# Altium PCB InputModule.PcbDoc
Units mm, origin at the board's own origin, x right, y up, seen from the top; angles counter-clockwise.
Board outline 37.08 x 57.91 mm, 2 copper layers (Top Layer, Bottom Layer); 53 components, 37 nets, 188 pads, 87 vias.
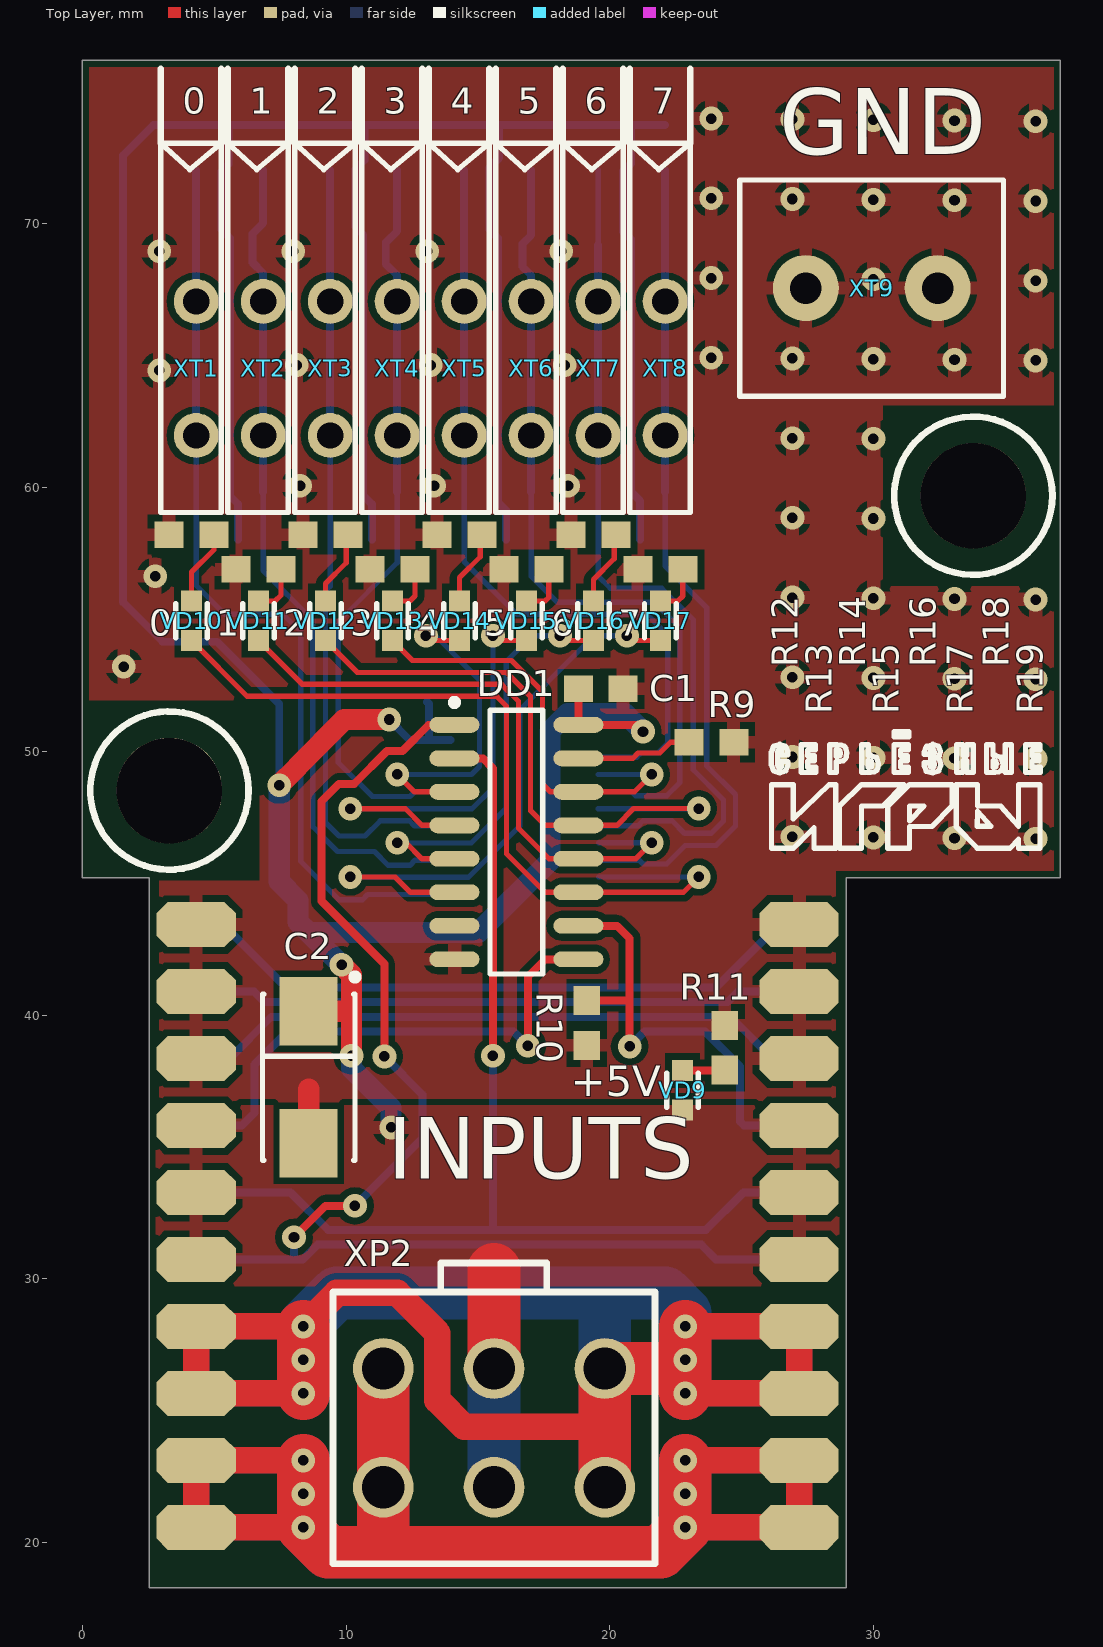
[diagram p0: Top Layer view]
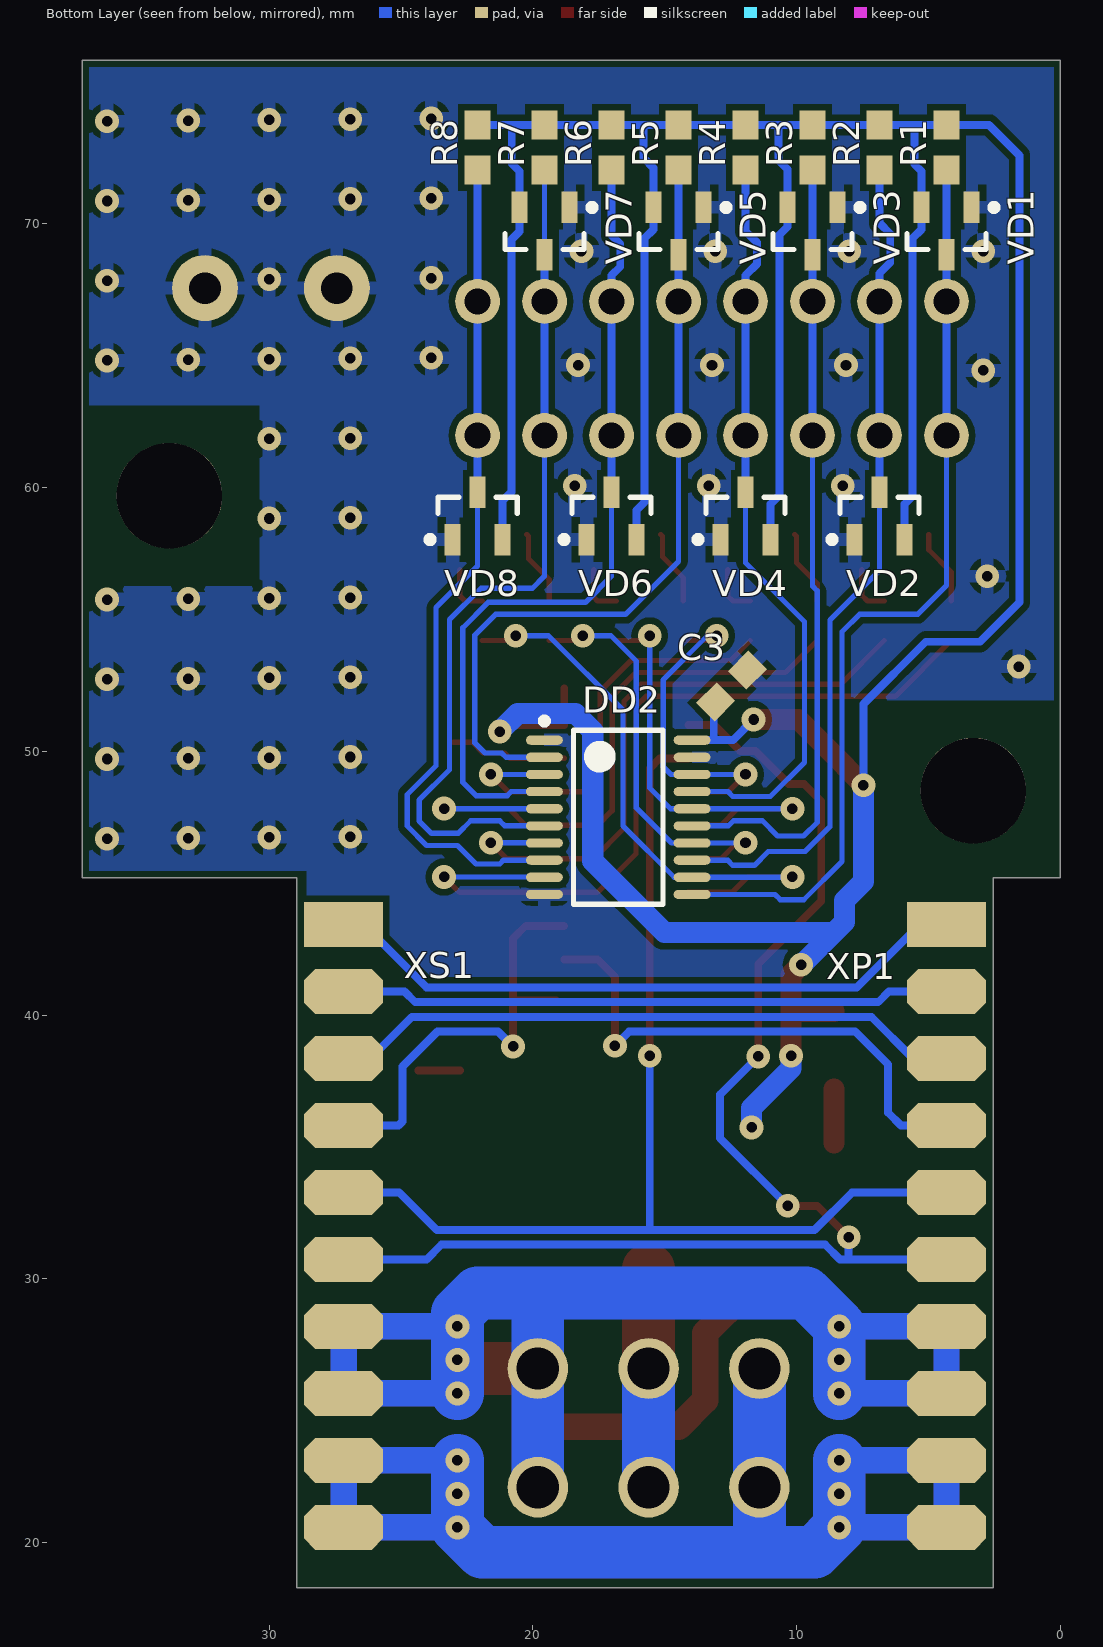
[diagram p1: Bottom Layer view, seen from below]
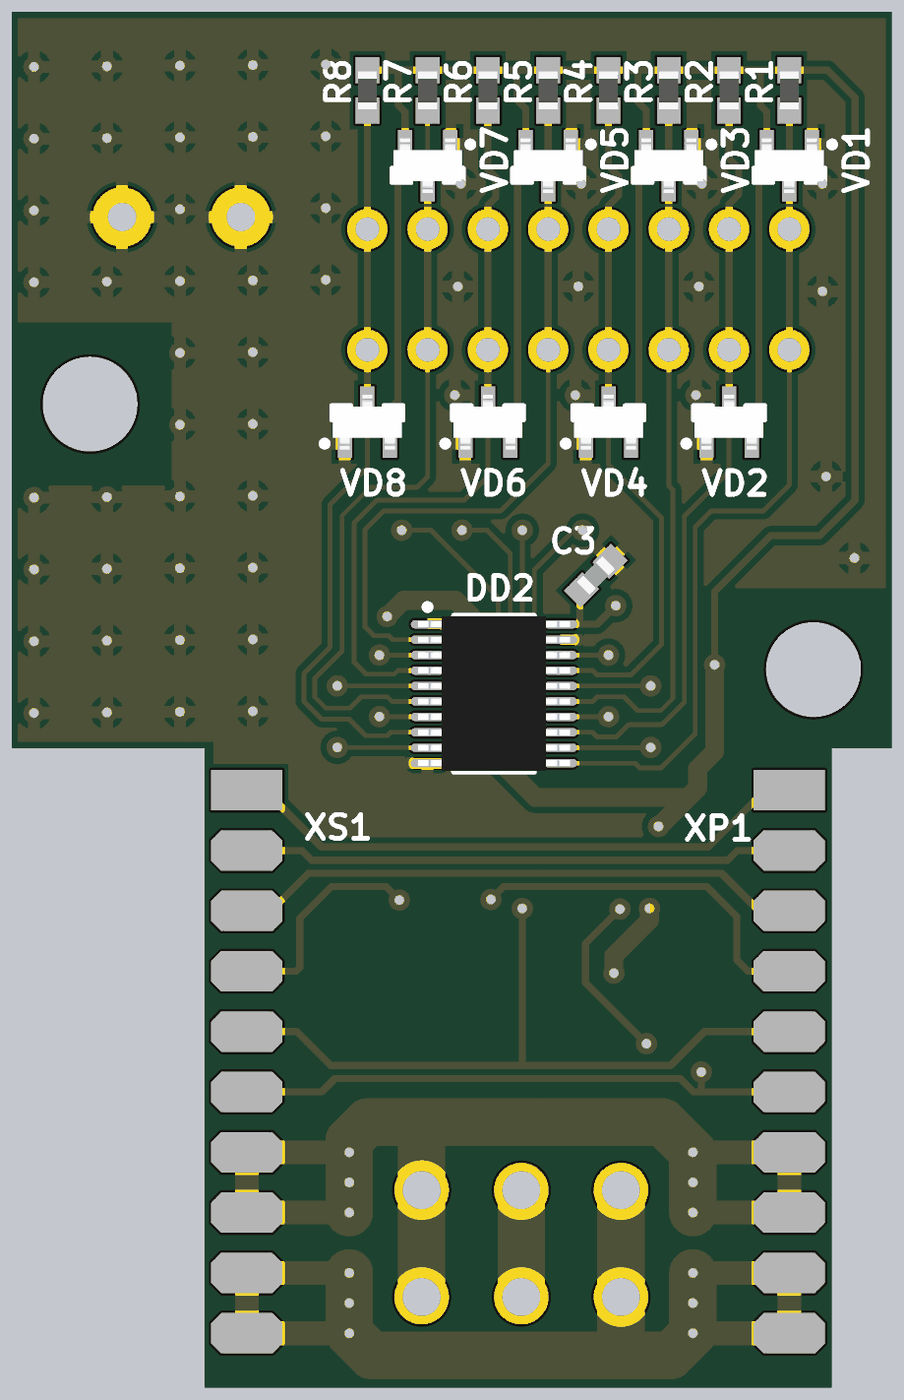
[diagram p2: 3D render of the assembled board from below, using the file's embedded part models]

## Layer stack, top to bottom
Top Layer: signal copper 0.0356
Dielectric: dielectric 0.32, FR-4, Dk 4.8
Bottom Layer: signal copper 0.0356

## Board outline
0,45.212 0,76.2 37.084,76.2 37.084,45.212 28.956,45.212 28.956,18.288 2.54,18.288 2.54,45.212

## Design rules (kind name [scope] priority, off if disabled: settings)
Clearance [All] p1: gap=0.254
PolygonConnect [All] p1: connectstyle=Relief reliefconductorwidth=0.5 reliefentries=4 polygonreliefangle="90 Angle"
RoutingVias [All] p1: holewidth=0.4 width=0.9 viastyle="Through Hole" minholewidth=0.3 minwidth=0.6 maxholewidth=7 maxwidth=7
SilkscreenOverComponentPads [All] p1: minsilkscreentomaskgap=0.254
SolderMaskExpansion [All] p1: expansion=0.102
Width [All] p1: maxlimit=5 minlimit=0.2 preferedwidth=0.3
27 further rules are at their usual default settings.

## Components (designator, comment, footprint, x,y, rotation, side; value= is the part's Value field where it differs from the comment)
C1 "0.1uF" C-1608[0603] 19.66,52.375 r0 top
C2 "47uF" C-CASE 8.585,37.643 r270 top
C3 "0.1uF" C-1608[0603] 12.471,52.476 r135 bottom
DD1 "74HC165D" SO-G16 16.459,46.558 r0 top
DD2 "SN74AHCT244" TSSOP20 16.764,47.498 r180 bottom
R1 "10K" R-1608[0603] 4.318,72.898 r90 bottom
R2 "10K" R-1608[0603] 6.858,72.898 r90 bottom
R3 "10K" R-1608[0603] 9.398,72.898 r90 bottom
R4 "10K" R-1608[0603] 11.938,72.898 r90 bottom
R5 "10K" R-1608[0603] 14.478,72.898 r90 bottom
R6 "10K" R-1608[0603] 17.018,72.898 r90 bottom
R7 "10K" R-1608[0603] 19.558,72.898 r90 bottom
R8 "10K" R-1608[0603] 22.098,72.898 r90 bottom
R9 "10K" R-1608[0603] 23.851,50.343 r0 top
R10 "10K" R-1608[0603] 19.126,39.7 r270 top
R11 "1K" R-1608[0603] 24.359,38.76 r270 top
R12 "1K" R-1608[0603] 4.14,58.217 r0 top locked
R13 "1K" R-1608[0603] 6.68,56.896 r0 top locked
R14 "1K" R-1608[0603] 9.22,58.217 r0 top locked
R15 "1K" R-1608[0603] 11.76,56.896 r0 top locked
R16 "1K" R-1608[0603] 14.3,58.217 r0 top locked
R17 "1K" R-1608[0603] 16.84,56.896 r0 top locked
R18 "1K" R-1608[0603] 19.38,58.217 r0 top locked
R19 "1K" R-1608[0603] 21.92,56.896 r0 top locked
VD1 "BAT54S" SOT-23 4.318,69.723 r270 bottom
VD2 "BAT54S" SOT-23 6.858,58.928 r90 bottom
VD3 "BAT54S" SOT-23 9.398,69.723 r270 bottom
VD4 "BAT54S" SOT-23 11.938,58.928 r90 bottom
VD5 "BAT54S" SOT-23 14.478,69.723 r270 bottom
VD6 "BAT54S" SOT-23 17.018,58.928 r90 bottom
VD7 "BAT54S" SOT-23 19.558,69.723 r270 bottom
VD8 "BAT54S" SOT-23 22.098,58.928 r90 bottom
VD9 "L-C191KGCT" LED-0603 22.758,37.897 r270 top
VD10 "L-C191KGCT" LED-0603 4.14,55.7 r270 top locked
VD11 "L-C191KGCT" LED-0603 6.68,55.7 r270 top locked
VD12 "L-C191KGCT" LED-0603 9.22,55.7 r270 top locked
VD13 "L-C191KGCT" LED-0603 11.76,55.7 r270 top locked
VD14 "L-C191KGCT" LED-0603 14.3,55.7 r270 top locked
VD15 "L-C191KGCT" LED-0603 16.84,55.7 r270 top locked
VD16 "L-C191KGCT" LED-0603 19.38,55.7 r270 top locked
VD17 "L-C191KGCT" LED-0603 21.92,55.7 r270 top locked
XP1 "PLD-20" "PLD-20 ROT" 4.318,43.434 r180 bottom
XP2 "MF-6M" MF-6M 19.812,22.098 r180 top
XS1 "PBD-20" "PBD-20 Rot" 27.178,43.434 r180 bottom
XT1 "DG141V-01P" "DG141V-01P (XY123R)" 4.318,61.976 r180 top
XT2 "DG141V-01P" "DG141V-01P (XY123R)" 6.858,61.976 r180 top
XT3 "DG141V-01P" "DG141V-01P (XY123R)" 9.398,61.976 r180 top
XT4 "DG141V-01P" "DG141V-01P (XY123R)" 11.938,61.976 r180 top
XT5 "DG141V-01P" "DG141V-01P (XY123R)" 14.478,61.976 r180 top
XT6 "DG141V-01P" "DG141V-01P (XY123R)" 17.018,61.976 r180 top
XT7 "DG141V-01P" "DG141V-01P (XY123R)" 19.558,61.976 r180 top
XT8 "DG141V-01P" "DG141V-01P (XY123R)" 22.098,61.976 r180 top
XT9 "1-1776244-0 (TYCO)" 1-1776244-0 27.432,67.564 r0 top

## Footprints (in the part's own frame and the unit in brackets; to place one, negate y for a bottom-side part, rotate by r counter-clockwise, add the part's x,y. Pads: shape width x height; smd on the part's side, far side on the other; paste and mask are expansions set on the pad)
1-1776244-0 [mm] "Винтовой клеммник 5.0мм"
  round 2.5 hole 1.2: 1(0,0) 2(5,0)
  silkscreen extent -2.5,-4.1 7.5,4.1, body extent -2.5,-4.1 7.5,4.1, height 10
C-1608[0603] [mm]
  rect 1.1x1 smd: 1(-0.85,0) 2(0.85,0)
  body extent -0.76,-0.38 0.76,0.38, height 0.5
C-CASE [mm]
  rect 2.6x2.2 smd: 1(-2.5,0) 2(2.5,0)
  silkscreen extent -3.92,-1.75 3.15,1.88, body extent -3,-1.6 3,1.6, height 2.51
"DG141V-01P (XY123R)" [mm] "Клеммник нажимной 2.54мм (XY123R-1)"
  round 1.7 hole 1: 1(0,0) 1(0,-5.08)
  silkscreen extent -0.95,-11.08 1.34,2.92, body extent -0.95,-11.08 1.34,2.92, height 12
LED-0603 [mm]
  rect 0.8x0.8 smd: 1(0,0) 2(1.5,0)
  silkscreen extent 0.1,-0.6 1.4,0.6
MF-6M [mm] "Molex Male Connector 6 pin"
  round 2.3 hole 1.6: 1(0,0) 2(4.2,0) 3(8.4,0) 4(0,-4.5) 5(4.2,-4.5) 6(8.4,-4.5)
  silkscreen extent -1.91,-8.5 10.31,2.9, body extent -1.91,-7.4 10.3,2.9, height 12.9
"PBD-20 Rot" [mm] "2.54mm 2row 20pin FEMALE connector"
  rect 3x1.7 smd: 1(0,0)
  oct 3x1.7 smd far side: 2(0,0) 4(0,-2.54) 6(0,-5.08) 8(0,-7.62) 10(0,-10.16) 12(0,-12.7) 14(0,-15.24) 16(0,-17.78) 18(0,-20.32) 20(0,-22.86)
  oct 3x1.7 smd: 3(0,-2.54) 5(0,-5.08) 7(0,-7.62) 9(0,-10.16) 11(0,-12.7) 13(0,-15.24) 15(0,-17.78) 17(0,-20.32) 19(0,-22.86)
  body extent -9.78,-24.18 -1.68,1.32, height 2.7
"PLD-20 ROT" [mm] "2.54mm 2 row 20 pin MALE connector"
  rect 3x1.7 smd: 1(0,0)
  oct 3x1.7 smd far side: 2(0,0) 4(0,-2.54) 6(0,-5.08) 8(0,-7.62) 10(0,-10.16) 12(0,-12.7) 14(0,-15.24) 16(0,-17.78) 18(0,-20.32) 20(0,-22.86)
  oct 3x1.7 smd: 3(0,-2.54) 5(0,-5.08) 7(0,-7.62) 9(0,-10.16) 11(0,-12.7) 13(0,-15.24) 15(0,-17.78) 17(0,-20.32) 19(0,-22.86)
  body extent 1.73,-24.08 9.45,1.32, height 2.7
R-1608[0603] [mm]
  rect 1.1x1 smd: 1(-0.85,0) 2(0.85,0)
  body extent -0.8,-0.4 0.8,0.4, height 0.37
SO-G16 [mm] "SOIC, 16-Leads, Body 9.9x3.9mm, Pitch 1.27mm, IPC High Density"
  oval 1.9x0.6 smd: 1(-2.35,4.445) 2(-2.35,3.175) 3(-2.35,1.905) 4(-2.35,0.635) 5(-2.35,-0.635) 6(-2.35,-1.905) 7(-2.35,-3.175) 8(-2.35,-4.445) 9(2.35,-4.445) 10(2.35,-3.175) 11(2.35,-1.905) 12(2.35,-0.635) 13(2.35,0.635) 14(2.35,1.905) 15(2.35,3.175) 16(2.35,4.445)
  silkscreen extent -2.47,-5 1,5.42, body extent -3,-4.95 3,4.95, height 1.53
SOT-23 [mm] "SOT23, 3-Leads, Body 2.9x1.3mm, Pitch 0.95mm, Lead Span 2.5mm, IPC High Density"
  rect 1.2x0.6 smd: 1(-0.9,0.95) 2(-0.9,-0.95) 3(0.9,0)
  silkscreen extent -1.02,-1.5 0.7,1.92, body extent -1.15,-1.45 1.15,1.45, height 1
TSSOP20 [mm] "TSOP, 20-Leads, Body 6.5x4.4mm, Pitch 0.65mm, IPC High Density"
  oval 1.4x0.35 smd: 1(-2.8,2.925) 2(-2.8,2.275) 3(-2.8,1.625) 4(-2.8,0.975) 5(-2.8,0.325) 6(-2.8,-0.325) 7(-2.8,-0.975) 8(-2.8,-1.625) 9(-2.8,-2.275) 10(-2.8,-2.925) 11(2.8,-2.925) 12(2.8,-2.275) 13(2.8,-1.625) 14(2.8,-0.975) 15(2.8,-0.325) 16(2.8,0.325) 17(2.8,0.975) 18(2.8,1.625) 19(2.8,2.275) 20(2.8,2.925)
  silkscreen extent -2.93,-3.3 1.7,3.77, body extent -3.2,-3.25 3.2,3.25, height 0.97

## Part data
C1 C3: library part C-0603, "C-0603"
C2: library part C-CCASE, "C-CCASE"
DD1: "8-Bit Parallel-Load Shift Register"
DD2: library part SN74LVC244APW, "Octal Buffer/Driver with 3-State Outputs"
R1 R2 R3 R4 R5 R6 R7 R8 R9 R10 R11 R12 R13 R14 R15 R16 R17 R18 R19: library part R-0603, "R-0603"
VD1 VD2 VD3 VD4 VD5 VD6 VD7 VD8: "Schottky barrier (double) diodes"
VD9 VD10 VD11 VD12 VD13 VD14 VD15 VD16 VD17: "0603 Green Led"
XP1: "20 pin, 2 row, MALE connector"
XP2: "Molex Male connector"
XS1: "2.54mm, 20 pin FEMALE connector"
XT1 XT2 XT3 XT4 XT5 XT6 XT7 XT8: "Клеммник нажимной 2.54мм"
XT9: "Винтовой клеммник 5.0мм"

## Free pads (board coordinates)
  round 4 hole 4 unplated: 0(3.302,48.514) 0(33.782,59.69)

## Via types
v1: diameter 0.9, hole 0.4, Top Layer to Bottom Layer, tented both sides, 87 vias

## Nets (pads, with @x,y where several pads share a name; then routed paths per layer and width w, separated by ;. In a path a pad name is that pad's centre, name@x,y a point inside that pad or via, vN(x,y) a via of type N, cw(c..) or ccw(c..) an arc to the next point about the centre after c; other vN are vias at no path point)
+5V: C1.1 C2.1 C3.1 DD1.16 DD2.20 R1.2 R2.2 R3.2 R4.2 R5.2 R6.2 R7.2 R8.2 VD1.2 VD2.2 VD3.2 VD4.2 VD5.2 VD6.2 VD7.2 VD8.2 VD9.2 XP1.8 XP1.10 XP1.12 XP2.2 XP2.5 XS1.8 XS1.10 XS1.12 | length 170.1
  Top Layer w0.3: C1.1 DD1.16 21.006,51.003 v1(21.26,50.749)
  Top Layer w0.8: v1(7.468,48.717) 8.153,49.403 8.153,49.428 9.931,51.206 v1(11.633,51.206) ; C2.1 10.196,40.143 ; v1(9.83,41.91) 10.211,41.529 v1(10.211,38.456)
  Top Layer w2: XP2.5 15.612,30.362
  Bottom Layer w0.3: 5.537,73.723 5.537,72.263 5.268,71.994 5.268,71.004 5.268,69.789 5.604,69.453 5.604,59.674 5.908,59.37 VD2.2 ; v1(7.468,48.717) 7.468,51.791 5.105,54.153 3.048,54.153 1.549,55.651 1.549,72.593 2.704,73.748 R1.2 R2.2 R3.2 R4.2 R5.2 R6.2 R7.2 R8.2 ; 10.693,73.723 10.693,72.415 10.348,72.07 10.348,71.004 10.348,69.891 10.652,69.587 10.652,59.706 10.988,59.37 VD4.2 ; v1(11.633,51.206) 12.417,50.423 DD2.20 ; C3.1 13.144,51.804 13.144,50.437 ; 15.799,73.672 15.799,72.492 15.428,72.121 15.428,71.004 15.428,69.789 15.764,69.453 15.764,59.445 16.068,59.141 VD6.2 ; 20.803,73.723 20.803,72.288 20.508,71.994 20.508,71.004 20.508,69.713 20.812,69.409 20.812,59.833 21.148,59.497 VD8.2
  Bottom Layer w0.8: v1(7.468,48.717) 7.468,45.06 8.179,44.348 8.179,43.536 8.585,43.129 ; v1(9.83,41.91) 9.804,41.91 8.585,43.129 ; v1(10.211,38.456) 10.211,37.973 11.709,36.474 v1(11.709,35.738) ; v1(21.26,50.749) 20.574,51.435 18.39,51.435 17.729,50.775 17.729,45.847 15.011,43.129 8.585,43.129
  Bottom Layer w2: XP2.2 XP2.5
+12V_HC: XP1.13 XP1.14 XP1.15 XP1.16 XP2.1 XP2.4 XS1.13 XS1.14 XS1.15 XS1.16 | length 99.8
  Top Layer w1: v1(8.382,25.654) XP1.16 XP1.14 v1(8.382,28.194) 9.652,29.464 11.938,29.464 13.462,27.94 13.462,25.4 14.478,24.384 19.812,24.384 ; v1(22.86,25.654) XS1.16 XS1.14 v1(22.86,28.194)
  Top Layer w2: v1(8.382,25.654) v1(8.382,26.924) v1(8.382,28.194) ; XP2.1 19.812,24.384 XP2.4 22.534,26.598 v1(22.86,26.924) ; v1(22.86,25.654) v1(22.86,26.924) ; v1(22.86,28.194) v1(22.86,26.924)
  Bottom Layer w1: v1(8.382,25.654) XP1.15 XP1.13 v1(8.382,28.194) ; v1(22.86,25.654) XS1.15 XS1.13 v1(22.86,28.194)
  Bottom Layer w2: v1(8.382,25.654) v1(8.382,26.924) v1(8.382,28.194) 9.652,29.464 19.812,29.464 ; XP2.1 XP2.4 19.812,29.464 ; v1(22.86,25.654) v1(22.86,26.924) v1(22.86,28.194) ; 22.86,28.702 22.098,29.464 19.812,29.464
C\E\: DD1.15 R9.1 | length 4.4
  Top Layer w0.2: DD1.15 20.87,49.733 21.073,49.936 21.895,49.936 22.301,50.343 R9.1
CLK: DD1.2 XP1.9 XS1.9 | length 43.2
  Top Layer w0.3: DD1.2 15.189,49.733 15.57,49.352 v1(15.57,38.456)
  Bottom Layer w0.3: XP1.9 7.895,33.274 9.322,31.847 15.57,31.847 ; v1(15.57,38.456) 15.57,31.847 ; XS1.9 25.07,33.274 23.643,31.847 15.57,31.847
DATA_TO_MASTER: DD1.9 XP1.7 | length 20.2
  Top Layer w0.3: v1(16.891,38.837) 16.891,41.453 17.551,42.113 DD1.9
  Bottom Layer w0.3: XP1.7 6.045,35.814 6.528,36.297 6.528,38.125 7.782,39.38 16.348,39.38 v1(16.891,38.837)
DI_0: DD2.11 R1.1 VD1.3 XT1.1 | length 35.9
  Bottom Layer w0.2: XT1.1@4.318,61.976 4.318,56.286 5.41,55.194 7.62,55.194 8.28,54.534 8.28,45.822 9.728,44.374 10.617,44.374 10.816,44.573 DD2.11
  Bottom Layer w0.3: XT1.1@4.318,61.976 4.318,67.056 VD1.3 ; VD1.3@4.318,69.204 VD1.3 ; R1.1 VD1.3
DI_1: DD2.13 R2.1 VD2.3 XT2.1 | length 31.9
  Bottom Layer w0.2: VD2.3 6.858,56.86 8.738,54.98 8.738,47.142 9.677,46.203 11.074,46.203 11.6,45.677 12.421,45.677 12.617,45.873 DD2.13
  Bottom Layer w0.3: VD2.3 6.858,61.976 6.858,67.056 6.858,68.123 6.452,68.529 6.452,69.621 6.858,70.028 R2.1
DI_2: DD2.15 R3.1 VD3.3 XT3.1 | length 30.5
  Bottom Layer w0.2: XT3.1@9.398,61.976 9.398,56.261 9.22,56.083 9.22,47.302 9.735,46.787 10.719,46.787 11.301,47.369 12.397,47.369 12.593,47.173 DD2.15
  Bottom Layer w0.3: XT3.1@9.398,61.976 9.398,67.056 VD3.3 ; VD3.3@9.398,69.204 VD3.3 ; R3.1 VD3.3
DI_3: DD2.17 R4.1 VD4.3 XT4.1 | length 28.6
  Bottom Layer w0.2: VD4.3 11.938,57.15 9.703,54.915 9.703,49.581 10.998,48.285 12.421,48.285 12.608,48.473 DD2.17
  Bottom Layer w0.3: VD4.3 11.938,61.976 11.938,67.056 11.938,68.047 11.506,68.478 11.506,69.291 11.938,69.723 R4.1
DI_4: DD2.2 R5.1 VD5.3 XT5.1 | length 31.1
  Bottom Layer w0.2: XT5.1@14.478,61.976 14.478,57.201 16.485,55.194 21.412,55.194 22.2,54.407 22.2,50.317 21.819,49.936 21.184,49.936 21.02,49.773 DD2.2
  Bottom Layer w0.3: XT5.1@14.478,61.976 14.478,67.056 VD5.3 ; VD5.3@14.478,69.204 VD5.3 ; R5.1 VD5.3
DI_5: DD2.4 R6.1 VD6.3 XT6.1 | length 31.4
  Bottom Layer w0.2: VD6.3 17.018,56.642 18.012,55.648 21.695,55.648 22.657,54.686 22.657,48.819 22.158,48.32 20.972,48.32 20.818,48.473 DD2.4
  Bottom Layer w0.3: VD6.3 17.018,61.976 17.018,67.056 17.018,68.047 16.688,68.377 16.688,69.24 17.018,69.571 R6.1
DI_6: DD2.6 R7.1 VD7.3 XT7.1 | length 33.4
  Bottom Layer w0.2: XT7.1@19.558,61.976 19.558,56.642 20.015,56.185 21.971,56.185 23.165,54.991 23.165,49.301 24.311,48.155 24.311,47.356 23.844,46.888 22.835,46.888 22.354,47.369 21.26,47.369 21.064,47.173 DD2.6 ; VD7.3 R7.1
  Bottom Layer w0.3: XT7.1@19.558,61.976 19.558,67.056 VD7.3 VD7.3@19.558,69.204
DI_7: DD2.8 R8.1 VD8.3 XT8.1 | length 31.8
  Bottom Layer w0.2: DD2.8 21.113,45.873 21.257,45.729 22.158,45.729 22.86,46.431 24.028,46.431 24.765,47.168 24.765,48.362 23.673,49.454 23.673,55.448 22.098,57.023 VD8.3
  Bottom Layer w0.3: VD8.3 22.098,61.976 22.098,67.056 R8.1
GND: C1.2 C2.2 C3.2 DD1.8 DD2.1 DD2.10 DD2.19 R9.2 R10.2 R11.1 R12.1 R13.1 R14.1 R15.1 R16.1 R17.1 R18.1 R19.1 VD1.1 VD2.1 VD3.1 VD4.1 VD5.1 VD6.1 VD7.1 VD8.1 XP1.2 XP1.4 XP1.6 XS1.2 XS1.4 XS1.6 XT9.1 XT9.2 | length 2
  Top Layer w0.8: C2.2 8.585,37.186
  other v1: 36.144,46.685 33.071,46.711 29.997,46.736 26.924,46.761 36.144,49.708 33.071,49.733 29.997,49.759 26.924,49.784 36.144,52.73 33.071,52.756 29.997,52.781 26.924,52.807 1.575,53.213 36.144,55.753 33.071,55.778 29.997,55.804 26.924,55.829 2.769,56.642 29.997,58.826 26.924,58.852 8.255,60.071 13.335,60.071 18.415,60.071 29.997,61.849 26.924,61.874 2.921,64.44 8.128,64.643 13.208,64.643 18.288,64.643 36.144,64.821 33.071,64.846 29.997,64.872 26.924,64.897 23.851,64.922 36.144,67.843 29.997,67.894 23.851,67.945 2.921,68.961 8.001,68.961 13.081,68.961 18.161,68.961 36.144,70.866 33.071,70.891 29.997,70.917 26.924,70.942 23.851,70.968 36.144,73.889 33.071,73.914 29.997,73.939 26.924,73.965 23.851,73.99
GND_HC: XP1.17 XP1.18 XP1.19 XP1.20 XP2.3 XP2.6 XS1.17 XS1.18 XS1.19 XS1.20 | length 91.2
  Top Layer w1: XP1.20 XP1.18 ; XP1.20@5.334,20.574 v1(8.382,20.574) ; XP1.18@5.334,23.114 v1(8.382,23.114) ; v1(22.86,20.574) XS1.20@26.416,20.574 ; v1(22.86,23.114) XS1.18@26.416,23.114 ; XS1.20 XS1.18
  Top Layer w2: v1(8.382,23.114) v1(8.382,21.844) v1(8.382,20.574) 9.322,19.634 21.92,19.634 v1(22.86,20.574) v1(22.86,21.844) v1(22.86,23.114) ; 11.412,19.634 XP2.3 XP2.6
  Bottom Layer w1: XP1.19 XP1.17 ; XP1.19@5.334,20.574 v1(8.382,20.574) ; XP1.17@5.334,23.114 v1(8.382,23.114) ; v1(22.86,20.574) XS1.19@26.416,20.574 ; v1(22.86,23.114) XS1.17@26.416,23.114 ; XS1.19 XS1.17
  Bottom Layer w2: v1(8.382,23.114) v1(8.382,20.574) 9.322,19.634 21.92,19.634 v1(22.86,20.574) v1(22.86,23.114) ; 11.412,19.634 XP2.6
LED_0: DD1.11 DD2.9 VD10.2 | length 31.9
  Top Layer w0.2: VD10.2 6.256,52.084 10.77,52.084 ; 12.141,52.084 10.77,52.084 ; v1(23.368,45.237) 22.784,44.653 DD1.11 17.551,44.653 16.088,46.117 16.088,51.709 15.713,52.084 10.77,52.084
  Bottom Layer w0.2: DD2.9@19.578,45.237 v1(23.368,45.237)
LED_1: DD1.12 DD2.7 VD11.2 | length 23.4
  Top Layer w0.2: VD11.2 8.342,52.538 15.901,52.538 16.542,51.897 16.542,47.085 17.704,45.923 DD1.12 20.98,45.923 v1(21.59,46.533)
  Bottom Layer w0.2: DD2.7@19.574,46.533 v1(21.59,46.533)
LED_2: DD1.13 DD2.5 VD12.2 | length 23.7
  Top Layer w0.2: VD12.2 10.428,52.992 16.089,52.992 16.996,52.085 16.996,47.749 17.551,47.193 DD1.13 20.269,47.193 20.904,47.828 v1(23.368,47.828)
  Bottom Layer w0.2: DD2.5 v1@23.363,47.823
LED_3: DD1.14 DD2.3 VD13.2 | length 16.6
  Top Layer w0.2: VD13.2 12.514,53.446 16.277,53.446 17.45,52.273 17.45,48.768 17.755,48.463 DD1.14 20.93,48.463 v1(21.59,49.124)
  Bottom Layer w0.2: DD2.3 v1(21.59,49.124)
LED_4: DD1.3 DD2.18 VD14.2 | length 13
  Top Layer w0.2: v1(11.938,49.122) 12.597,48.463 DD1.3 ; v1(13.03,54.38) 13.21,54.2 VD14.2
  Bottom Layer w0.2: v1(11.938,49.122) DD2.18 14.757,49.123 15.062,49.428 15.062,52.705 13.387,54.38 v1(13.03,54.38)
LED_5: DD1.4 DD2.16 VD15.2 | length 17.1
  Top Layer w0.2: v1(10.16,47.827) 12.244,47.827 12.878,47.193 DD1.4 ; v1(15.57,54.38) 15.75,54.2 VD15.2
  Bottom Layer w0.2: v1@10.164,47.823 DD2.16 14.778,47.823 15.57,48.615 v1(15.57,54.38)
LED_6: DD1.5 DD2.14 VD16.2 | length 16.4
  Top Layer w0.2: v1(11.938,46.532) 12.269,46.532 12.878,45.923 DD1.5 ; v1(18.11,54.38) 18.29,54.2 VD16.2
  Bottom Layer w0.2: v1@11.947,46.523 DD2.14 14.748,46.523 16.078,47.854 16.078,53.416 17.042,54.38 v1(18.11,54.38)
LED_7: DD1.6 DD2.12 VD17.2 | length 22.3
  Top Layer w0.2: v1(10.16,45.236) v1(10.16,45.236) 11.863,45.236 12.446,44.653 DD1.6 ; v1(20.65,54.38) 20.83,54.2 VD17.2
  Bottom Layer w0.2: v1@10.173,45.223 DD2.12 14.641,45.223 16.586,47.168 16.586,51.562 19.404,54.38 v1@20.605,54.38
NetR11_2: R11.2 VD9.1 | length 1.6
  Top Layer w0.3: VD9.1 R11.2@24.345,37.897
NetR12_2: R12.2 VD10.1 | length 2.9
  Top Layer w0.2: VD10.1 4.14,56.794 4.99,57.644 R12.2
NetR13_2: R13.2 VD11.1 | length 1.9
  Top Layer w0.2: VD11.1 7.313,55.7 7.53,55.917 R13.2
NetR14_2: R14.2 VD12.1 | length 2.9
  Top Layer w0.2: VD12.1 9.22,56.362 10.006,57.148 10.006,58.153 R14.2
NetR15_2: R15.2 VD13.1 | length 1.9
  Top Layer w0.2: VD13.1 12.418,55.7 12.61,55.892 R15.2
NetR16_2: R16.2 VD14.1 | length 2.9
  Top Layer w0.2: VD14.1 14.3,56.591 15.086,57.377 15.086,58.153 R16.2
NetR17_2: R17.2 VD15.1 | length 2
  Top Layer w0.2: VD15.1 17.549,55.7 17.69,55.841 R17.2
NetR18_2: R18.2 VD16.1 | length 2.9
  Top Layer w0.2: VD16.1 19.38,56.515 20.166,57.301 20.166,58.153 R18.2
NetR19_2: R19.2 VD17.1 | length 1.9
  Top Layer w0.2: VD17.1 22.578,55.7 22.77,55.892 R19.2
NetXP1_1: XP1.1 XS1.1 | length 23.1
  Bottom Layer w0.3: XP1.1@5.334,43.434 7.722,41.046 24.028,41.046 XS1.1@26.416,43.434
NetXP1_3: XP1.3 XS1.3 | length 21.4
  Bottom Layer w0.3: XP1.3@5.334,40.894 6.502,40.894 6.909,40.488 24.46,40.488 24.867,40.894 XS1.3@26.416,40.894
NetXP1_5: XP1.5 XS1.5 | length 22.4
  Bottom Layer w0.3: XP1.5@5.334,38.354 5.588,38.354 7.168,39.934 24.582,39.934 26.162,38.354 XS1.5@26.416,38.354
P\L\: DD1.1 XP1.11 XS1.11 | length 51.2
  Top Layer w0.3: v1(8.026,31.572) 9.22,32.766 v1(10.338,32.766) ; v1(11.455,38.43) 11.455,41.935 9.068,44.323 9.068,48.108 9.728,48.768 10.312,48.768 11.557,50.013 12.141,50.013 13.132,51.003 DD1.1
  Bottom Layer w0.3: XP1.11 8.026,30.734 ; v1(8.026,31.572) 8.026,30.734 ; v1(10.338,32.766) 12.903,35.331 12.903,36.982 v1(11.455,38.43) ; XS1.11 24.028,30.734 23.47,31.293 8.915,31.293 8.357,30.734 8.026,30.734
SLAVE_DATA: DD1.10 R10.1 XS1.7 | length 17.1
  Top Layer w0.3: DD1.10 20.269,43.383 20.752,42.901 v1(20.752,38.811) ; R10.1 20.662,40.55
  Bottom Layer w0.3: v1(20.752,38.811) 21.32,39.38 23.612,39.38 24.943,38.049 24.943,35.966 25.095,35.814 XS1.7
pads on no net: DD1.7

## Polygon pours and split planes (outlines as drawn)
+5V on Top Layer "Top Layer-No Net" (solid, remove dead copper, pour order 1000): 2.794,36.576 2.794,29.718 28.702,29.718 28.702,36.576
GND on Top Layer "Top Layer-No Net" (solid, remove dead copper, pour order 1000): 0.254,75.946 0.254,51.943 5.41,51.943 6.731,51.943 6.731,46.736 6.731,45.085 2.921,45.085 2.921,35.814 28.575,35.814 28.575,45.466 36.83,45.466 36.83,56.261 31.75,56.261 30.353,56.261 30.353,62.001 30.353,63.119 36.805,63.119 36.83,63.119 36.83,75.946
GND on Bottom Layer "Top Layer-No Net" (solid, remove dead copper, pour order 1001): 0.254,75.946 0.254,51.943 5.41,51.943 6.731,51.943 6.731,46.736 6.731,45.085 2.921,45.085 2.921,35.814 28.575,35.814 28.575,45.466 36.83,45.466 36.83,56.261 31.75,56.261 30.353,56.261 30.353,62.001 30.353,63.119 36.805,63.119 36.83,63.119 36.83,75.946

## Silkscreen, mask and mechanical layers (free items; w line width, h text height)
Top Overlay:
  drawing of 237 lines, arcs and shapes, not listed
  text "0" at 3.81,74.168 h1
  text "1" at 6.35,74.168 h1
  text "2" at 8.89,74.168 h1
  text "3" at 11.43,74.168 h1
  text "4" at 13.97,74.168 h1
  text "5" at 16.51,74.168 h1
  text "6" at 19.05,74.168 h1
  text "7" at 21.59,74.168 h1
  text "GND" at 26.416,72.644 h2.5
  text "0" at 2.54,54.381 h1
  text "1" at 5.08,54.381 h1
  text "2" at 7.62,54.381 h1
  text "3" at 10.16,54.381 h1
  text "4" at 12.7,54.381 h1
  text "5" at 15.24,54.381 h1
  text "6" at 17.78,54.381 h1
  text "7" at 20.32,54.381 h1
  text "+5V" at 18.517,36.525 h2
  text "INPUTS" at 11.582,33.02 h4
Mechanical 1:
  the board outline again, w0.2